# Altium PCB PCB1.PcbDoc
Units mm, origin at the board's own origin, x right, y up, seen from the top; angles counter-clockwise.
Board outline 46.36 x 30.86 mm, 2 copper layers (Top Layer, Bottom Layer); 12 components, 6 nets, 31 pads, 0 vias.
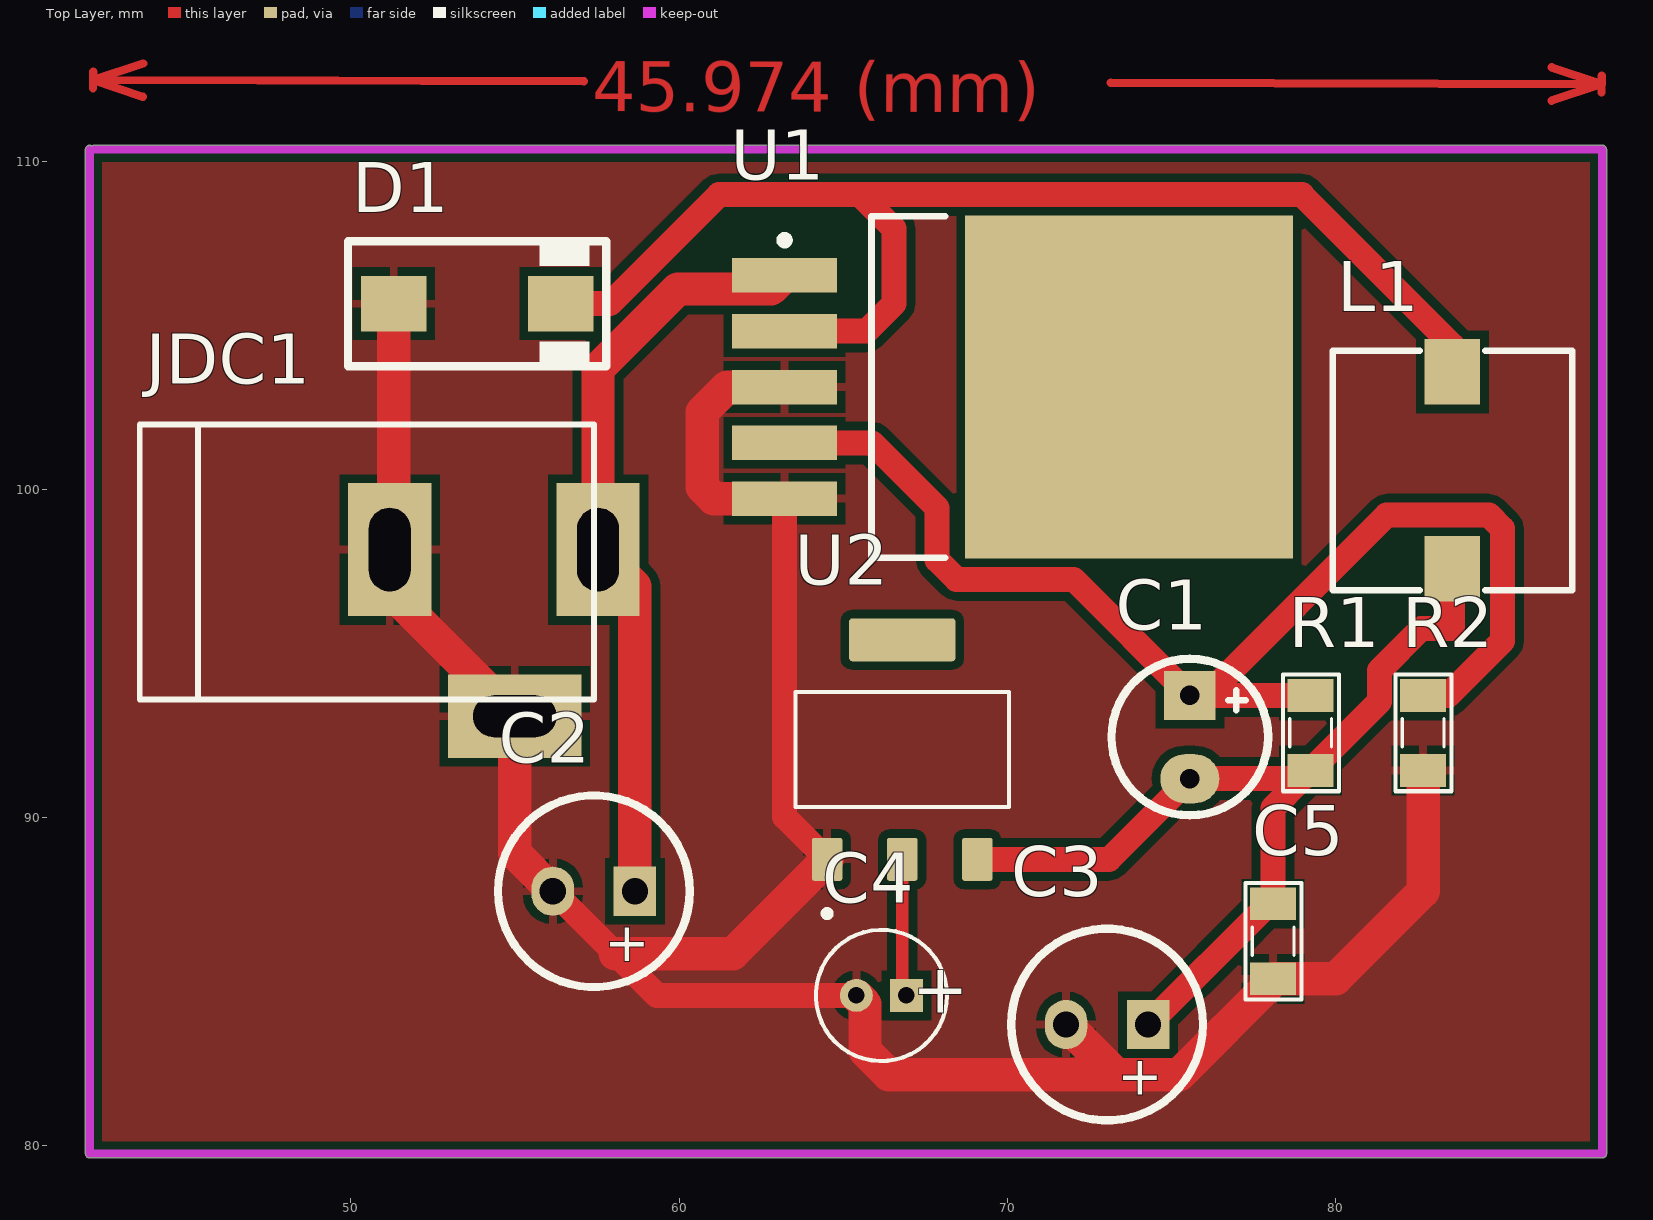
[diagram p0: Top Layer view]
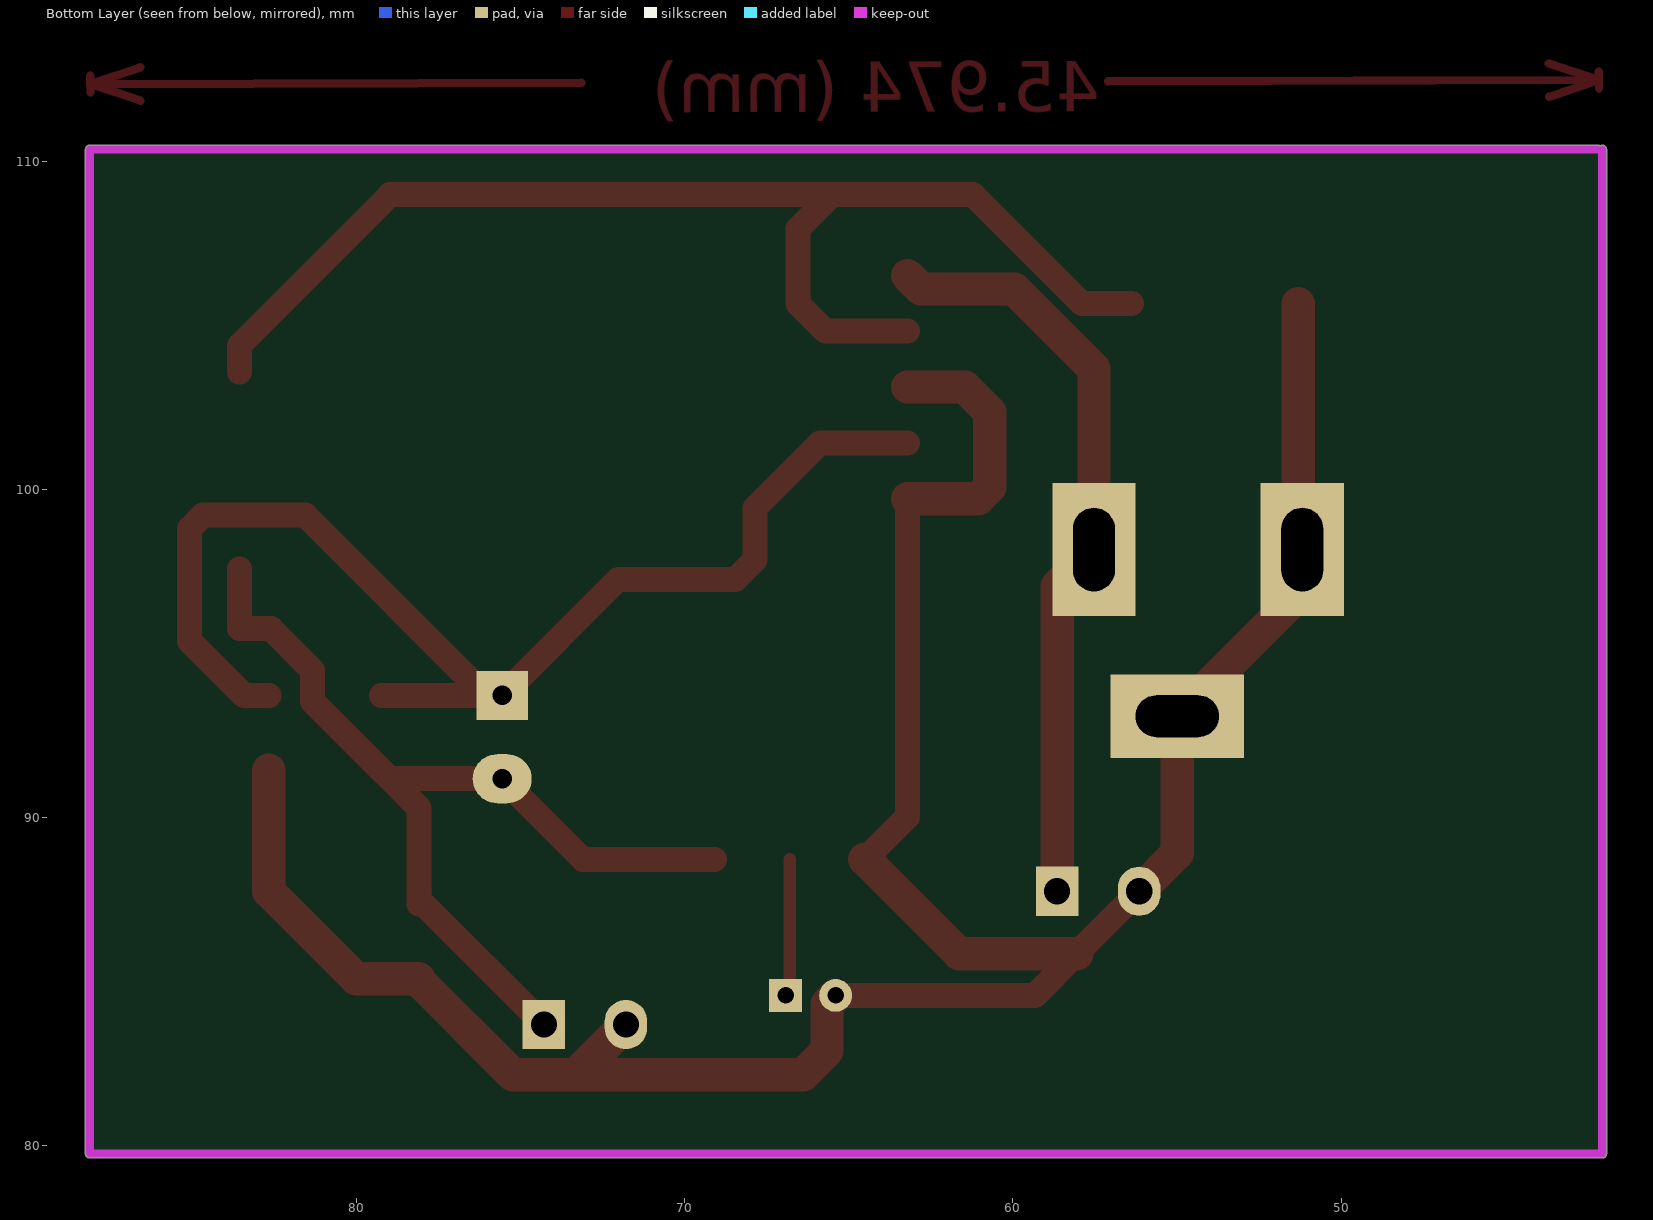
[diagram p1: Bottom Layer view, seen from below]
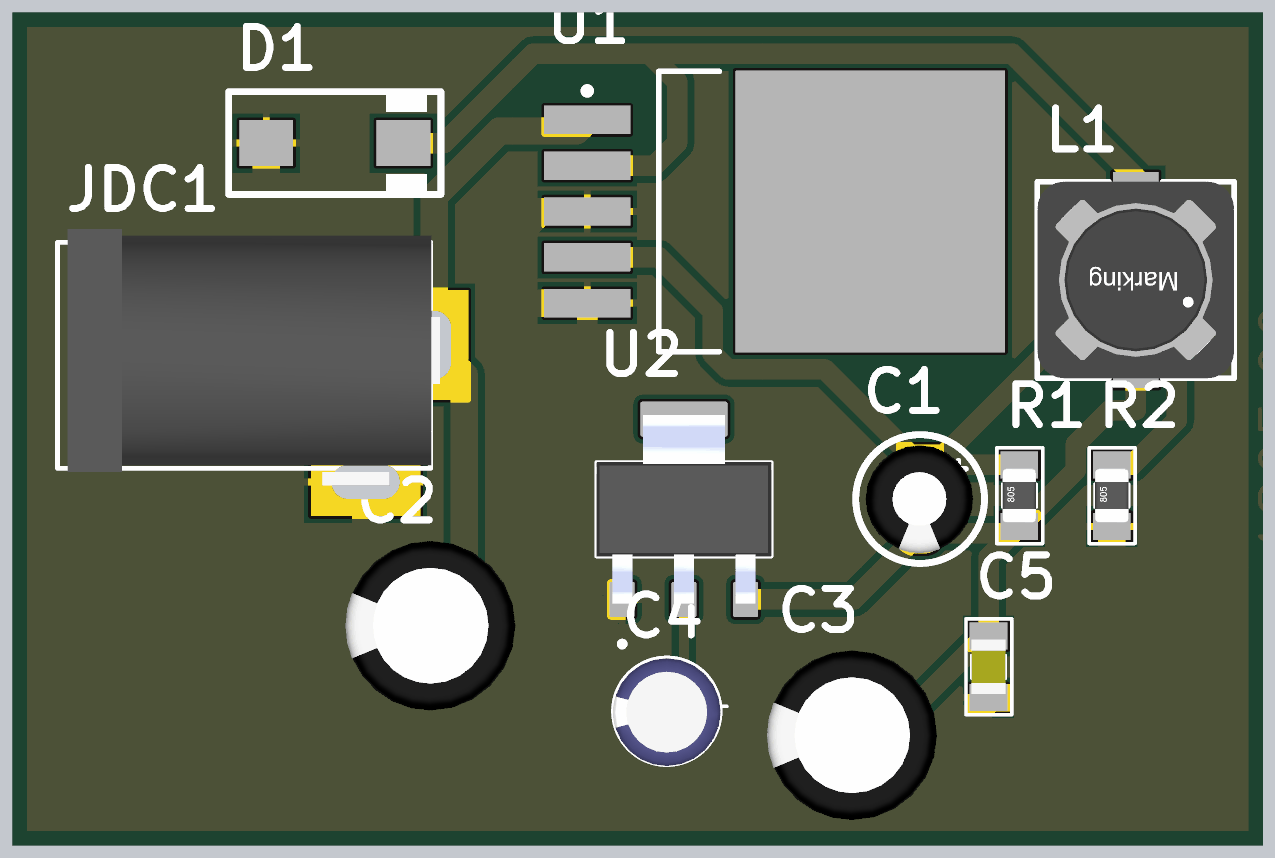
[diagram p2: 3D render of the assembled board from above, using the file's embedded part models]

## Layer stack, top to bottom
Top Solder: solder mask 0.0102, Solder Resist, Dk 3.5
Top Layer: signal copper 0.0356
Dielectric 1: dielectric 0.32, FR-4, Dk 4.8
Bottom Layer: signal copper 0.0356
Bottom Solder: solder mask 0.0102, Solder Resist, Dk 3.5

## Board outline
42.037,79.629 cw(c42.037,79.756) 41.91,79.756 41.91,110.363 cw(c42.037,110.363) 42.1,110.473 cw(c42.164,110.363) 42.164,110.49 88.138,110.49 cw(c88.138,110.363) 88.265,110.363 88.265,79.756 cw(c88.138,79.756) 88.138,79.629

## Design rules (kind name [scope] priority, off if disabled: settings)
Clearance [All] p1: gap=0.254 ignorepadtopadclearanceinfootprint=FALSE except(0: Arc-Hole Track-Hole SMDPad-Hole THPad-Hole Via-Hole Fill-Hole Poly-Hole Region-Hole Text-Hole)
PolygonConnect [All] p1: connectstyle=Relief reliefconductorwidth=0.254 reliefentries=4 polygonreliefangle="90 Angle" airgapwidth=0.254
RoutingVias [All] p1: holewidth=0.711 width=1.27 viastyle="Through Hole" minholewidth=0.711 minwidth=1.27 maxholewidth=0.711 maxwidth=1.27
SolderMaskExpansion [All] p1: expansion=0.102
Width [All] p1: maxlimit=1.016 minlimit=0.381 preferedwidth=0.762
30 further rules are at their usual default settings.

## Components (designator, comment, footprint, x,y, rotation, side; value= is the part's Value field where it differs from the comment)
C1 "3.3nf" C3MM 75.565,92.456 r270 top
C2 "330uf, 16V" C8mm 57.404,87.757 r180 top
C3 "470uf, 25V" C8mm 73.045,83.693 r180 top
C4 "22uf, 16V" CA-ALU-4 66.167,84.582 r180 top
C5 "10uf, 16V" CAP_0805 78.105,86.233 r90 top value=33p
D1 "1N5822" SMA 53.848,105.664 r0 top value="Diode c?m 1N5408"
JDC1 "Jac DC" DC-IN 54.356,95.631 r0 top
L1 "22uH" L-SMD-M-7.3x4.5 83.566,100.584 r0 top value="150 mH"
R1 "3k" RES-SMD-0805 79.248,92.583 r90 top
R2 "1k" RES-SMD-0805 82.677,92.583 r90 top
U1 "LM2976" TO-263 69.215,103.124 r0 top
U2 "AMS1117-3.3" SOT229P700X180-4N 66.802,92.075 r90 top

## Footprints (in the part's own frame and the unit in brackets; to place one, negate y for a bottom-side part, rotate by r counter-clockwise, add the part's x,y. Pads: shape width x height; smd on the part's side, far side on the other; paste and mask are expansions set on the pad)
C3MM [mm]
  rect 1.5x1.58 hole 0.6: 1(-1.27,0)
  oval 1.5x1.8 hole 0.6: 2(1.27,0)
  silkscreen extent -2.39,-2.39 2.39,2.39, body extent -2,-2.03 1.99,1.97, height 7.01
C8mm [mm]
  rect 1.3x1.5 hole 0.8: 1(-1.25,0)
  oval 1.3x1.5 hole 0.8: 2(1.25,0)
  silkscreen extent -2.92,-2.92 2.92,2.92, body extent -3.15,-3.15 3.16,3.15, height 11.51
CA-ALU-4 [mm] "Polarized capacitors, Aluminum Electrolytic Capacitors, 2-Leads, Body 5x11x2x0.5"
  rect 1x1 hole 0.5: 1(-0.762,0)
  round 1 hole 0.5: 2(0.762,0)
  silkscreen extent -2,-2 2,2, body extent -2,-1.97 2,2.03, height 7.5
CAP_0805 [mil]
  rect 39.37x55 smd: 1(-45,0) 2(45,0)
  silkscreen extent -70,-34 70,33, body extent -40,-25 40,25, height 24
DC-IN [mil] "Jac DC input"
  rect 100x160 hole 50 slot 100 at 90 deg: 1(125,100) 2(-125,100)
  rect 160x100 hole 50 slot 100 at 0 deg: 3(25,-100)
  silkscreen extent -425,-80 120,250, body extent -410,-105 134,269, height 434
L-SMD-M-7.3x4.5 [mm] "WE-PDA SMD Shielded Power Inductor, 7345"
  rect 1.7x2 smd: 1(0,3) 2(0,-3)
  silkscreen extent -3.65,-3.65 3.65,3.65, body extent -3.65,-3.65 3.65,3.65, height 4.05
RES-SMD-0805 [mil]
  rect 39.37x55 smd: 1(-45,0) 2(45,0)
  silkscreen extent -70,-34 70,33, body extent -39,-25 39,25, height 31
SMA [mm]
  rect 2x1.7 smd: 1(-2.544,0) 2(2.544,0)
  silkscreen extent -3.94,-1.9 3.94,1.91, body extent -2.87,-1.4 2.87,1.4, height 2.29
SOT229P700X180-4N [mm]
  rrect15% 1.31x0.93 smd: 1(-3.345,2.29) 2(-3.345,0) 3(-3.345,-2.29)
  rrect15% 1.31x3.24 smd: 4(3.345,0)
  silkscreen extent -5.1,-3.25 1.75,3.25, body extent -3.5,-3.25 3.5,3.25, height 1.8
TO-263 [mm]
  rect 3.2x1.05 smd: 1(-6,3.4) 2(-6,1.7) 3(-6,0) 4(-6,-1.7) 5(-6,-3.4)
  rect 10x10.45 smd: 6(4.5,0)
  silkscreen extent -6.12,-5.2 -1.1,5.2, body extent -6.58,-5.2 7.57,5.2, height 4.65

## Part data
C1 C2 C3 C4: library part "Cap Pol", "Polarized Capacitor (Axial)", LatestRevisionDate=17-Jul-2002, LatestRevisionNote="Re-released for DXP Platform.", PackageReference=POLAR0.8, Published=8-Jun-2000, Publisher="Altium Limited"
C5: library part CapSMD, "Capacitor", LatestRevisionDate=17-Jul-2002, LatestRevisionNote="Re-released for DXP Platform.", PackageReference=RAD-0.3, Published=8-Jun-2000, Publisher="Altium Limited"
D1: "Schottky Rectifiers"
JDC1: library part DCIN, "Jac DC input"
L1: library part Inductor, "Inductor"
R1 R2: library part "Resistor - SMD", "Resistor SMD", Manufacturer="Generic Components", Class=Passive, Published=08/06/2000, Publisher="Altium Hobart Technology Centre"
U1: library part LM2596, Max Input Voltage="12 V", Max Output Current="3 (6.0 peak) A", Max Output Voltage=mV, Temperature Range="-40 to +125 degC", Category=IC-Power, Min Input Voltage=mV, Min Output Voltage=mV, Mounting Technology="Surface Mount", Status=Unreleased, Supply Voltage=mV
U2: "Sot223/Pkg 1-Amp 3.3-Volt Low Drop Out Voltage Regulatator", Package="SOT-223 Seeed Technology", Availability="Not in stock", Check_prices=https://www.snapeda.com/parts/AMS1117-3.3/Advanced+Monolithic+Systems/view-part/?ref=eda, MF="Advanced Monolithic Systems", MP=AMS1117-3.3, Price=None, SnapEDA_Link=https://www.snapeda.com/parts/AMS1117-3.3/Advanced+Monolithic+Systems/view-part/?ref=snap

## Nets (pads, with @x,y where several pads share a name; then routed paths per layer and width w, separated by ;. In a path a pad name is that pad's centre, name@x,y a point inside that pad or via, vN(x,y) a via of type N, cw(c..) or ccw(c..) an arc to the next point about the centre after c; other vN are vias at no path point)
3.3V: C4.1 U2.2 | length 4.2
  Top Layer w0.381: U2.2 66.802,84.709 C4.1
+5: C1.2 C3.1 C5.2 L1.2 R1.1 U2.3 | length 29.3
  Top Layer w0.762: U2.3 73.109,88.73 C1.2 R1.1@78.994,91.186 ; C3.1 77.978,87.376 C5.2 78.105,90.297 R1.1@78.994,91.186 ; L1.2 83.566,95.758 82.612,95.758 81.343,94.489 81.343,93.535 R1.1 R1.1@78.994,91.186
+12: C2.1 JDC1.1 U1.1 | length 23.3
  Top Layer w1.016: C2.1 58.654,97.048 JDC1.1 57.531,103.683 59.959,106.111 62.802,106.111 U1.1
GND: C2.2 C3.2 C4.2 C5.1 D1.1 JDC1.2 JDC1.3 R2.1 U1.3 U1.5 U2.1 | length 84.8
  Top Layer w0.762: C2.2 58.059,85.852 59.329,84.582 C4.2 ; U1.5 63.215,90.027 U2.1
  Top Layer w1.016: D1.1 51.304,98.294 JDC1.2 51.181,96.901 JDC1.3 54.991,88.92 C2.2 ; 58.059,85.852 61.634,85.852 U2.1 ; U1.5 61.058,99.724 60.706,100.076 60.706,102.362 61.468,103.124 U1.3 ; C4.2 65.667,84.32 65.667,82.894 66.392,82.169 73.319,82.169 ; C3.2 73.319,82.169 ; R2.1 82.677,87.757 80.01,85.09 C5.1 78.105,85.025 75.249,82.169 73.319,82.169
NetC1_1: C1.1 R1.2 R2.2 U1.4 | length 38.1
  Top Layer w0.762: U1.4 65.879,101.424 67.867,99.436 67.867,97.849 68.452,97.264 72.027,97.264 C1.1 C1.1@76.073,93.726 ; R1.2 C1.1@76.073,93.726 ; R2.2 83.439,93.726 85.092,95.379 85.092,98.806 84.679,99.219 81.566,99.219 C1.1@76.073,93.726
NetD1_2: D1.2 L1.1 U1.2 | length 38.7
  Top Layer w0.762: D1.2 57.895,105.664 61.215,108.984 65.514,108.984 ; U1.2 65.708,104.824 66.548,105.664 66.548,107.95 65.514,108.984 ; L1.1 83.566,104.396 78.978,108.984 65.514,108.984
pads on no net: U1.6 U2.4
copper on no net: | length 37.4
  Top Layer w0.254: 42.14,112.227 42.142,112.735 ; 43.664,111.968 42.141,112.481 ; 43.666,112.984 42.141,112.481 ; 57.104,112.439 42.141,112.481 ; 73.152,112.395 88.115,112.354 ; 86.59,111.85 88.115,112.354 ; 86.593,112.866 88.115,112.354 ; 88.114,112.1 88.116,112.608

## Polygon pours and split planes (outlines as drawn)
GND on Top Layer (solid, remove dead copper, pour order 0): 42.037,110.363 42.037,79.756 88.138,79.756 88.138,110.363

## Keep-outs
Keep-Out Layer:
  lines w0.254: 42.037,110.363 42.037,102.711 ; 42.164,110.363 88.138,110.363 88.138,79.756 42.037,79.756 42.037,87.408 42.037,91.234 42.037,98.885 42.037,102.711 ; 42.037,102.711 42.037,102.711

## Other copper
Top Layer:
  text "45.974 (mm)" at 57.356,111.524 h1.52 r359.84

## Dimensions
89.535,110.363 to 88.773,79.756 on Top Layer

## Text inside footprints (layer, text, board x,y; h text height)
C2: Top Overlay "+" at 59.106,86.639 h1.2 r180
C3: Top Overlay "+" at 74.747,82.575 h1.2 r180
C4: Top Overlay "+" at 68.834,85.344 h1.5 r180